# Altium PCB 工大宣区_气温.PcbDoc
Units mil, origin at the board's own origin, x right, y up, seen from the top; angles counter-clockwise.
Board outline 1920 x 2620 mil, 2 copper layers (Top Layer, Bottom Layer); 14 components, 15 nets, 65 pads, 6 vias.
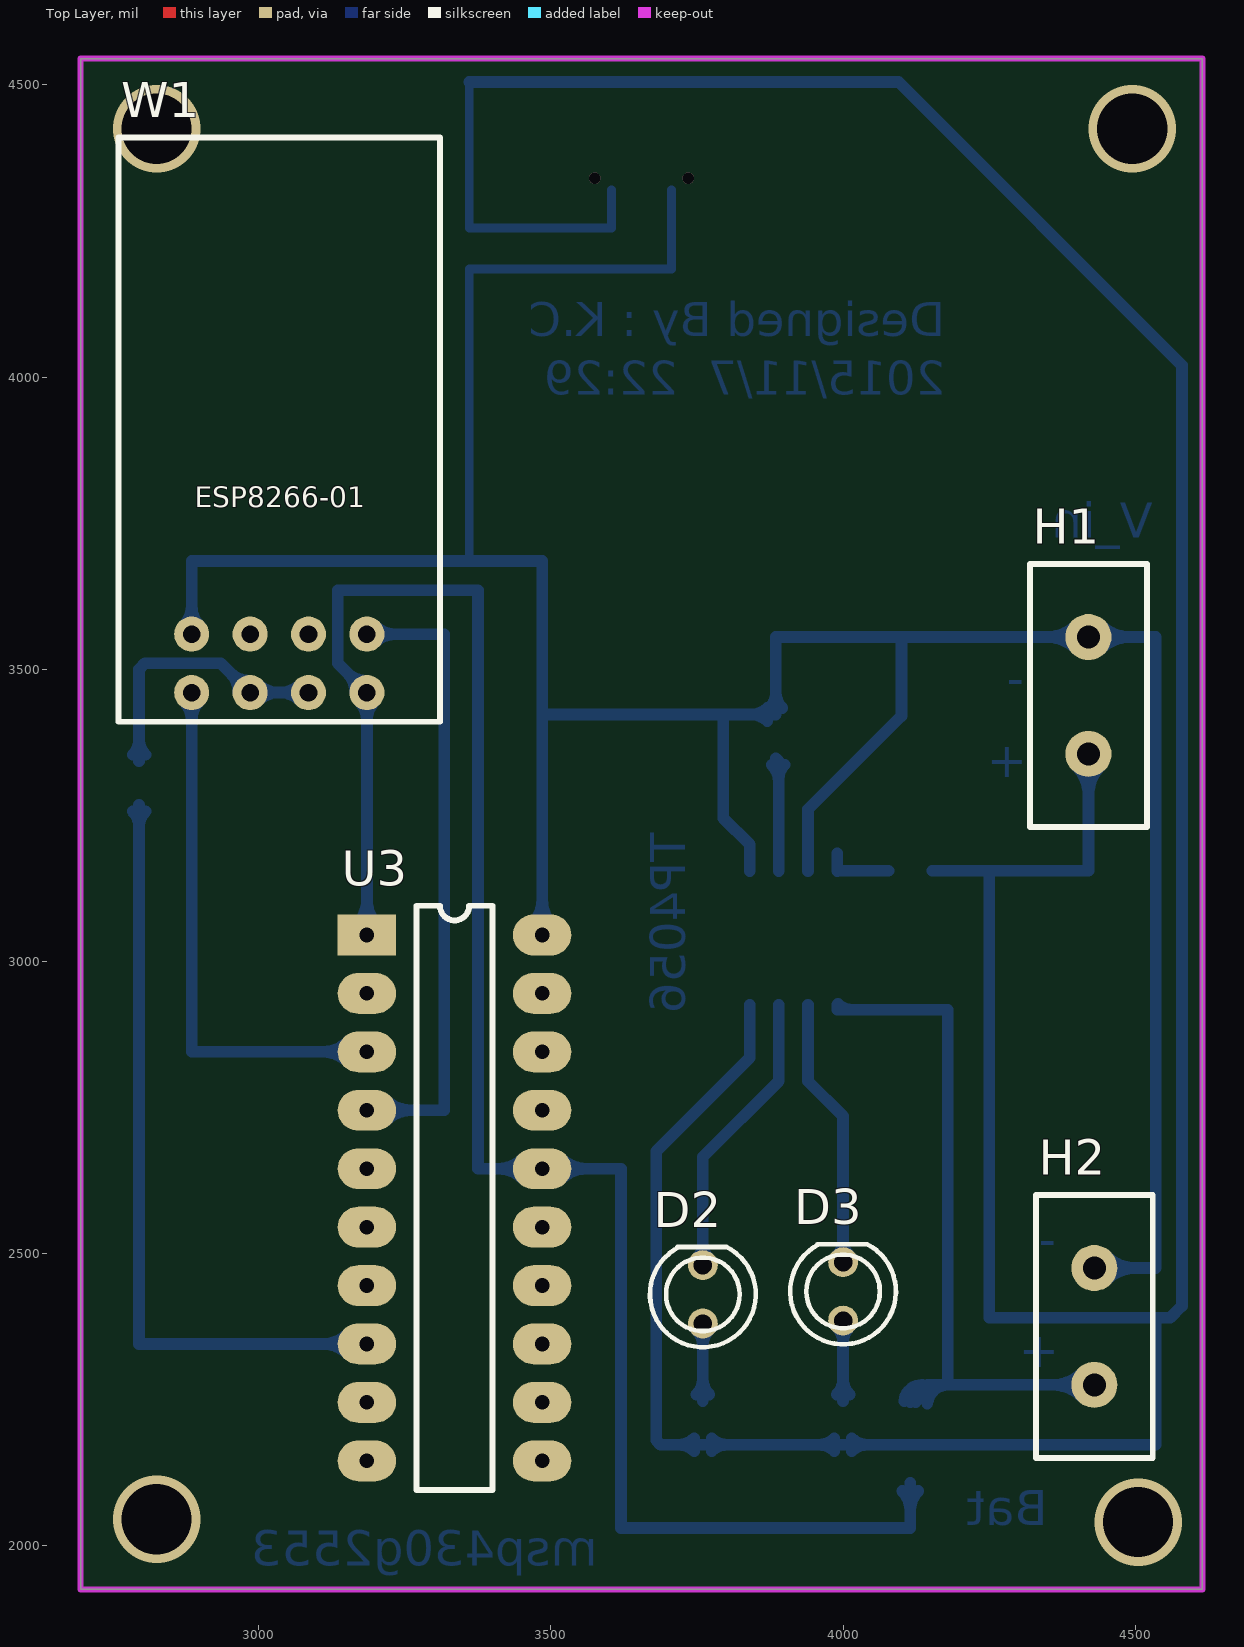
[diagram p0: Top Layer view]
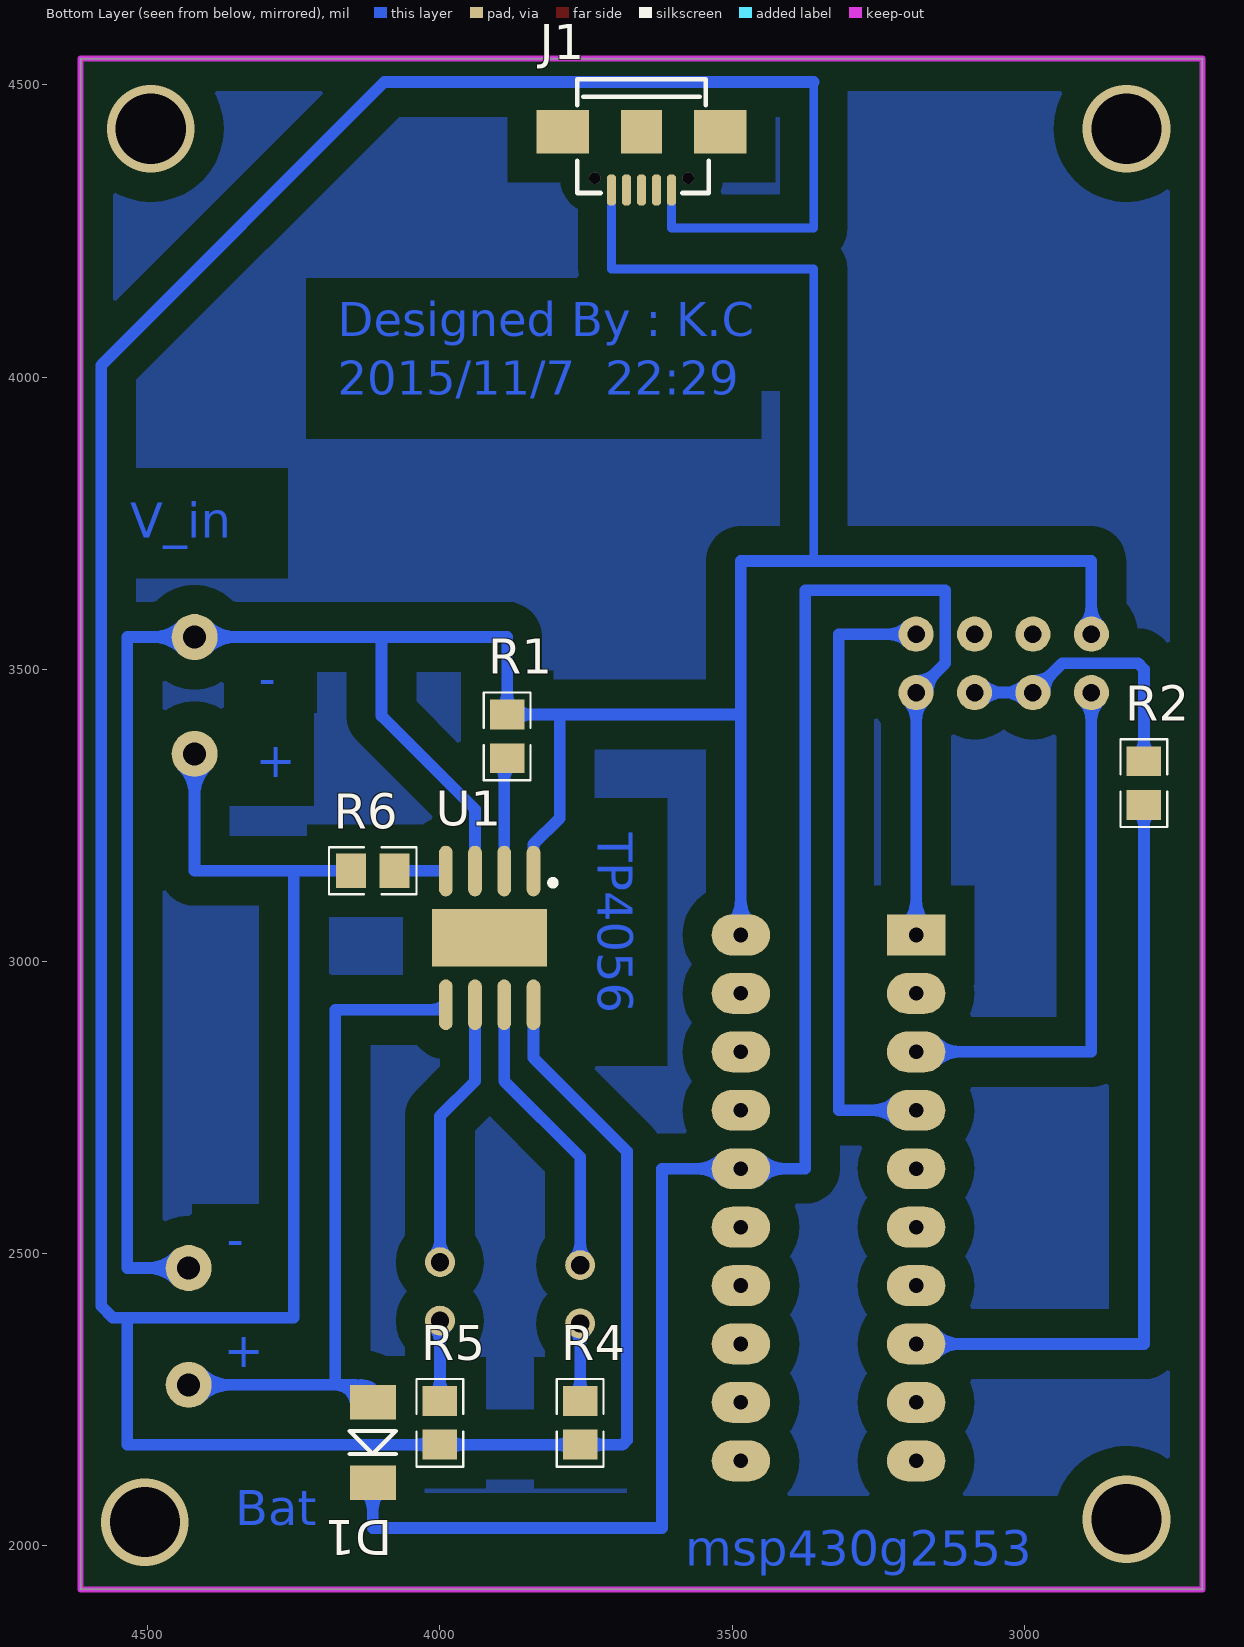
[diagram p1: Bottom Layer view, seen from below]

## Layer stack, top to bottom
Top Solder: solder mask 0.4, Solder Resist, Dk 3.5
Top Layer: signal copper 1.4
Dielectric 1: dielectric 12.6, FR-4, Dk 4.8
Bottom Layer: signal copper 1.4
Bottom Solder: solder mask 0.4, Solder Resist, Dk 3.5

## Board outline
2695,1925 2695,4545 4615,4545 4615,1925

## Design rules (kind name [scope] priority, off if disabled: settings)
Clearance [All] p1: gap=10
PolygonConnect [All] p1: connectstyle=Relief reliefconductorwidth=10 reliefentries=4 polygonreliefangle="90 Angle" airgapwidth=10
RoomDefinition 工大宣区_气温 [InComponentClass('工大宣区_气温')] p1: confinementstyle=ConfineIn formatcopy=TRUE lockcomponents=FALSE outline 0,0 2000,0 2000,1000 0,1000
RoutingLayers [All] p1: top layer_v5=FALSE bottom layer_v5=TRUE
RoutingVias [All] p1: holewidth=28 width=50 viastyle="Through Hole" minholewidth=28 minwidth=50 maxholewidth=28 maxwidth=50
SolderMaskExpansion [All] p1: expansion=4
Width [All] p1: maxlimit=20 minlimit=10 preferedwidth=15 toplayer_maxwidth=10 toplayer_prefwidth=10 minimp=50.000000 maximp=50.000000 favimp=50.000000
28 further rules are at their usual default settings.

## Components (designator, comment, footprint, x,y, rotation, side; value= is the part's Value field where it differs from the comment)
D1 "Diode" DIODE-1206 4115,2245 r270 bottom
D2 "LED0" LED_A2 3760,2430 r270 top
D3 "LED0" LED_A2 4000,2435 r270 top
H1 "Header_2_5.04" Header_2_5.04 4420,3480 r90 top
H2 "Header_2_5.04" Header_2_5.04 4430,2400 r90 top
J1 "USB_M" USB_MICRO 3655,4420 r0 bottom
R1 "Res1" 0805-1 3885,3385 r270 bottom
R2 "Res1" 0805-1 2795,3305 r90 bottom
R4 "Res1" 0805-1 3760,2210 r270 bottom
R5 "Res1" 0805-1 4000,2210 r270 bottom
R6 "Res1" 0805-1 4115,3155 r0 bottom
U1 "TP4056" NSO8_TP4056 3915,3040 r270 bottom
U3 "msp430G2" DIP20 3185,3045 r0 top
W1 "ESP8266" ESP8266 2910,3560 r90 top

## Footprints (in the part's own frame and the unit in brackets; to place one, negate y for a bottom-side part, rotate by r counter-clockwise, add the part's x,y. Pads: shape width x height; smd on the part's side, far side on the other; paste and mask are expansions set on the pad)
0805-1 [mm] "贴片带丝印"
  rect 1.3x1.5 smd: 1(-0.95,0) 2(0.95,0)
  silkscreen extent -1.91,-1.02 1.91,1.02, body extent -1.14,-0.51 1.14,0.51, height 1
DIODE-1206 [mm] "玻璃封装二极管"
  rect 1.5x2 smd: 1(0,0) 2(3.5,0)
  silkscreen extent 1.25,-1 2.25,1
DIP20 [mil]
  rect 100x70 hole 25: 1(0,0)
  oval 100x70 hole 25: 2(0,-100) 3(0,-200) 4(0,-300) 5(0,-400) 6(0,-500) 7(0,-600) 8(0,-700) 9(0,-800) 10(0,-900) 11(300,-900) 12(300,-800) 13(300,-700) 14(300,-600) 15(300,-500) 16(300,-400) 17(300,-300) 18(300,-200) 19(300,-100) 20(300,0)
  silkscreen extent 85,-950 215,50
ESP8266 [mil] "WIFI模块"
  round 60 hole 30: 1(-100,25) 2(-100,-75) 3(-100,-175) 4(-100,-275) 5(0,-275) 6(0,-175) 7(0,-75) 8(0,25)
  silkscreen extent -150,-400 850,150
Header_2_5.04 [mm]
  round 2 hole 1: 1(-3.175,0) 2(1.905,0)
  silkscreen extent -6.35,-2.54 5.08,2.54
LED_A2 [mm] "直径3MM二极管"
  round 1.3 hole 0.8: 1(1.27,0) 2(-1.27,0)
  silkscreen extent -2.06,-2.3 2.3,2.3
NSO8_TP4056 [mm] "SOIC-max660"
  oval 2.2x0.6 smd: 1(-2.908,1.905) 2(-2.908,0.635) 3(-2.908,-0.635) 4(-2.908,-1.905) 5(2.908,-1.905) 6(2.908,-0.635) 7(2.908,0.635) 8(2.908,1.905)
  rect 2.5x5 smd: 9(0,0)
  silkscreen extent -2.52,2.63 -2.28,2.88
USB_MICRO [mm] "USB方孔"
  oct 0.4x1.35 smd: 1(-1.3,2.54) 2(-0.65,2.54) 3(0,2.54) 4(0.65,2.54) 5(1.3,2.54)
  rect 2.286x1.9 smd: 6(3.429,0) 7(-3.429,0)
  rect 1.8x1.9 smd: 8(0,0)
  silkscreen extent -2.92,-2.29 2.79,2.67

## Part data
D1: "二极管"
D2 D3: "发光二极管"
J1: "MicroUSB接口"
R1 R2 R4 R5 R6: "贴片电阻"
U1: "锂电池充电管理"
W1: library part ESP8266-01

## Via types
v1: diameter 150, hole 120, Top Layer to Bottom Layer, 4 vias
v2: diameter 19.68, hole 19.68, Top Layer to Bottom Layer, 2 vias

## Nets (pads, with @x,y where several pads share a name; then routed paths per layer and width w, separated by ;. In a path a pad name is that pad's centre, name@x,y a point inside that pad or via, vN(x,y) a via of type N, cw(c..) or ccw(c..) an arc to the next point about the centre after c; other vN are vias at no path point)
3.3V: D1.2 U3.1 U3.16 W1.4 | length 3783.1
  Bottom Layer w20: W1.4@3165,3460 ccw(c3116.72,3460) 3150.86,3494.14 ccw(c3185,3528.28) W1.4@3185,3480 ; U3.1@3167.32,3062.68 ccw(c3124.64,3105.36) 3185,3105.36 ccw(c3245.36,3105.36) U3.1@3202.68,3062.68 ; W1.4@3170.86,3445.86 cw(c3136.72,3411.72) 3185,3411.72 cw(c3233.28,3411.72) W1.4@3199.14,3445.86 ; U3.1 W1.4 3135,3510 3135,3635 3375,3635 3375,2645 U3.16 3620,2645 3620,2030 4115,2030 D1.2 ; U3.16@3452.32,2627.32 ccw(c3409.64,2584.64) 3409.64,2645 ccw(c3409.64,2705.36) U3.16@3452.32,2662.68 ; U3.16@3517.68,2627.32 cw(c3560.36,2584.64) 3560.36,2645 cw(c3560.36,2705.36) U3.16@3517.68,2662.68 ; D1.2@4101.19,2093.4 cw(c4067.86,2060.06) 4115,2060.06 cw(c4162.14,2060.06) D1.2@4128.81,2093.4
5V: H1.1 J1.1 R4.2 R5.2 R6.2 U1.8 | length 7395.7
  Bottom Layer w15: 3360,4505 3360,4255 3603.82,4255 J1.1
  Bottom Layer w20: 3360,4505 4095,4505 4580,4020 4580,2410 4560,2390 4535,2390 ; R4.2@3745.04,2161.57 ccw(c3718.42,2134.96) 3718.42,2172.6 ccw(c3718.42,2210.24) R4.2@3745.04,2183.62 ; R4.2@3774.96,2161.57 cw(c3801.58,2134.96) 3801.58,2172.6 cw(c3801.58,2210.24) R4.2@3774.96,2183.62 ; U1.8 3840,2835 3680,2675 3680,2180 3687.4,2172.6 R4.2 R5.2 4535,2172.6 4535,2390 ; R5.2@3985.04,2161.57 ccw(c3958.42,2134.96) 3958.42,2172.6 ccw(c3958.42,2210.24) R5.2@3985.04,2183.62 ; R5.2@4014.96,2161.57 cw(c4041.58,2134.96) 4041.58,2172.6 cw(c4041.58,2210.24) R5.2@4014.96,2183.62 ; R6.2 4250,3155 ; H1.1@4399.23,3334.23 cw(c4349.09,3284.09) 4420,3284.09 cw(c4490.91,3284.09) H1.1@4440.77,3334.23 ; H1.1 4420,3155 4250,3155 ; 4250,3155 4250,2390 4535,2390
BAT: D1.1 H2.1 U1.5 | length 1491.5
  Bottom Layer w20: U1.5 3990,2917 4179,2917 4179,2275 ; U1.5@3991.28,2926.79 ccw(c4014.92,2950.43) 4014.92,2917 ; D1.1@4104.45,2246.82 cw(c4135.26,2244.07) 4135.26,2275 ; D1.1 4145,2275 ; D1.1@4124.37,2245.04 cw(c4157.13,2242.11) 4157.13,2275 ; D1.1@4124.84,2264.53 ccw(c4124.84,2287.91) D1.1@4141.38,2271.38 ; D1.1@4142,2254.32 cw(c4157.35,2262.65) 4145,2275 ; D1.1@4144.29,2243.26 cw(c4179,2240.16) 4179,2275 ; H2.1@4409.23,2254.23 ccw(c4359.09,2204.09) 4359.09,2275 ccw(c4359.09,2345.91) H2.1@4409.23,2295.77 ; H2.1 4179,2275 ; 4145,2275 4179,2275
CTRL: R2.2 W1.2 W1.3 | length 759.1
  Bottom Layer w20: R2.2@2783.98,3353.43 ccw(c2757.36,3380.04) 2795,3380.04 ccw(c2832.64,3380.04) R2.2@2806.02,3353.43 ; R2.2 2795,3500 2805,3510 2935,3510 W1.2 W1.3 ; W1.2@2965,3460 ccw(c2916.72,3460) 2950.86,3494.14 ccw(c2985,3528.28) W1.2@2985,3480 ; W1.2@2999.14,3445.86 cw(c3033.28,3411.72) 3033.28,3460 cw(c3033.28,3508.28) W1.2@2999.14,3474.14 ; W1.3@3070.86,3445.86 ccw(c3036.72,3411.72) 3036.72,3460 ccw(c3036.72,3508.28) W1.3@3070.86,3474.14
DHT: U3.5
GND: H1.2 H2.2 J1.5 R1.1 U1.1 U1.3 U3.20 W1.8 | length 6090.2
  Bottom Layer w15: 3360,3685 3360,4185 3706.18,4185 J1.5
  Bottom Layer w20: W1.8@2870.86,3574.14 ccw(c2836.72,3608.28) 2885,3608.28 ccw(c2933.28,3608.28) W1.8@2899.14,3574.14 ; W1.8 2885,3685 3360,3685 3485,3685 U3.20 ; U3.20@3467.32,3062.68 ccw(c3424.64,3105.36) 3485,3105.36 ccw(c3545.36,3105.36) U3.20@3502.68,3062.68 ; 3485,3422.4 3795,3422.4 ; U1.1 3840,3200 3795,3245 3795,3422.4 ; R1.1@3870.04,3411.38 ccw(c3843.42,3384.76) 3843.42,3422.4 ccw(c3843.42,3460.04) R1.1@3870.04,3433.43 ; R1.1@3873.98,3433.43 ccw(c3847.36,3460.04) 3885,3460.04 ccw(c3922.64,3460.04) R1.1@3896.02,3433.43 ; U1.3 3940,3260 4100,3420 4100,3555 ; H1.2@4399.23,3534.23 ccw(c4349.09,3484.09) 4349.09,3555 ccw(c4349.09,3625.91) H1.2@4399.23,3575.77 ; H2.2 4535,2475 4535,3555 H1.2 4100,3555 ; H1.2@4440.77,3534.23 cw(c4490.91,3484.09) 4490.91,3555 cw(c4490.91,3625.91) H1.2@4440.77,3575.77 ; H2.2@4450.77,2454.23 cw(c4500.91,2404.09) 4500.91,2475 cw(c4500.91,2545.91) H2.2@4450.77,2495.77 ; 3795,3422.4 R1.1 3885,3555 4100,3555
NetD2_1: D2.1 R4.1 | length 250.8
  Bottom Layer w20: R4.1@3748.98,2258.43 ccw(c3722.36,2285.04) 3760,2285.04 ccw(c3797.64,2285.04) R4.1@3771.02,2258.43 ; D2.1@3748.98,2368.98 cw(c3722.36,2342.36) 3760,2342.36 cw(c3797.64,2342.36) D2.1@3771.02,2368.98 ; R4.1 D2.1
NetD2_2: D2.2 U1.7 | length 558.5
  Bottom Layer w20: D2.2@3748.98,2491.02 ccw(c3722.36,2517.64) 3760,2517.64 ccw(c3797.64,2517.64) D2.2@3771.02,2491.02 ; D2.2 3760,2665 3890,2795 U1.7
NetD3_1: D3.1 R5.1 | length 255.8
  Bottom Layer w20: R5.1@3988.98,2258.43 ccw(c3962.36,2285.04) 4000,2285.04 ccw(c4037.64,2285.04) R5.1@4011.02,2258.43 ; D3.1@3988.98,2373.98 cw(c3962.36,2347.36) 4000,2347.36 cw(c4037.64,2347.36) D3.1@4011.02,2373.98 ; R5.1 D3.1
NetD3_2: D3.2 U1.6 | length 524.5
  Bottom Layer w20: U1.6 3940,2795 4000,2735 D3.2 ; D3.2@3988.98,2496.02 ccw(c3962.36,2522.64) 4000,2522.64 ccw(c4037.64,2522.64) D3.2@4011.02,2496.02
NetR1_2: R1.2 U1.2 | length 254.3
  Bottom Layer w20: R1.2@3877.91,3336.57 cw(c3848.73,3307.39) 3890,3307.39 ; R1.2 3890,3342.6 U1.2 ; 3890,3312.53 cw(c3924.01,3312.53) R1.2@3899.96,3336.57
NetR6_1: R6.1 U1.4 | length 118.3
  Bottom Layer w20: U1.4@3990,3185 U1.4 3990.51,3155 R6.1
P20: R2.1 U3.8 | length 1466.5
  Bottom Layer w20: R2.1@2783.98,3256.57 cw(c2757.36,3229.96) 2795,3229.96 cw(c2832.64,3229.96) R2.1@2806.02,3256.57 ; R2.1 2795,2345 U3.8 ; U3.8@3152.32,2327.32 ccw(c3109.64,2284.64) 3109.64,2345 ccw(c3109.64,2405.36) U3.8@3152.32,2362.68
RXD: U3.3 W1.1 | length 1085.7
  Bottom Layer w20: W1.1@2870.86,3445.86 cw(c2836.72,3411.72) 2885,3411.72 cw(c2933.28,3411.72) W1.1@2899.14,3445.86 ; W1.1 2885,2845 U3.3 ; U3.3@3152.32,2827.32 ccw(c3109.64,2784.64) 3109.64,2845 ccw(c3109.64,2905.36) U3.3@3152.32,2862.68
TXD: U3.4 W1.5 | length 1250
  Bottom Layer w20: U3.4 3317.16,2745 3317.16,3560 W1.5 ; W1.5@3199.14,3545.86 cw(c3233.28,3511.72) 3233.28,3560 cw(c3233.28,3608.28) W1.5@3199.14,3574.14 ; U3.4@3217.68,2727.32 cw(c3260.36,2684.64) 3260.36,2745 cw(c3260.36,2805.36) U3.4@3217.68,2762.68
pads on no net: J1.2 J1.3 J1.4 J1.6 J1.7 J1.8 U1.9 U3.2 U3.6 U3.7 U3.9 U3.10 U3.11 U3.12 U3.13 U3.14 U3.15 U3.17 U3.18 U3.19 W1.6 W1.7
copper on no net: | length 9080
  Bottom Layer w5: 2695,1925 2695,4545 4615,4545 4615,1925 2695,1925
  other v1: 4505,2040 2825,2045 2825,4425 4495,4425
  other v2: 3575,4340 3735,4340

## Polygon pours and split planes (outlines as drawn)
no net on Bottom Layer "Bottom Layer-No Net" (solid, pour order 3): 4615,4535 4615,1925 2700,1925 2695,1930 2700,1935 2700,4545

## Keep-outs
Keep-Out Layer:
  the board outline again, w10

## Other copper
Bottom Layer:
  text "Designed By : K.C" at 4175,4050 h100
  text "2015/11/7  22:29" at 4175,3950 h100
  text "V_in" at 4530,3725 h60
  text "-" at 4310,3455 h60
  text "+" at 4315,3315 h60
  text "TP4056" at 3730,3220 h60 r90
  text "-" at 4365,2495 h60
  text "+" at 4370,2305 h60
  text "Bat" at 4350,2035 h60
  text "msp430g2553" at 3580,1965 h60

## Text inside footprints (layer, text, board x,y; h text height)
W1: Top Overlay "ESP8266-01" at 2890,3765 h60